# Altium PCB lab4.PcbDoc
Units mil, origin at the board's own origin, x right, y up, seen from the top; angles counter-clockwise.
Board outline 10500 x 5900 mil, 2 copper layers (Top Layer, Top, Bottom Layer, Bottom); 23 components, 17 nets, 61 pads, 0 vias.
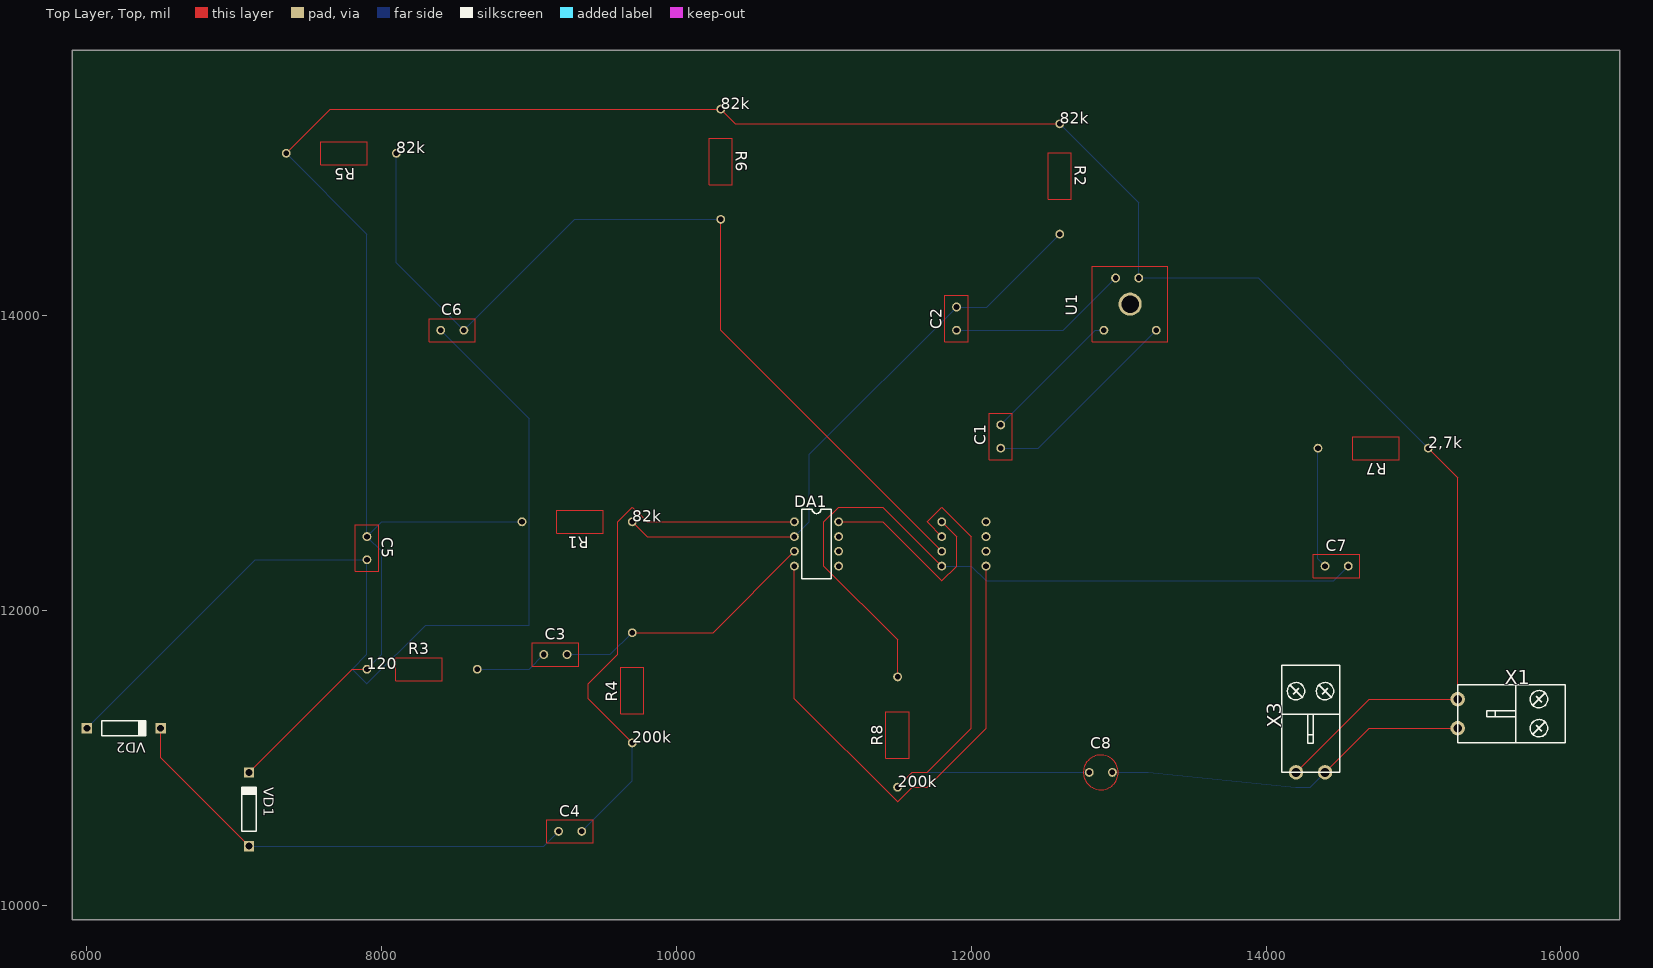
[diagram p0: Top Layer, Top view]
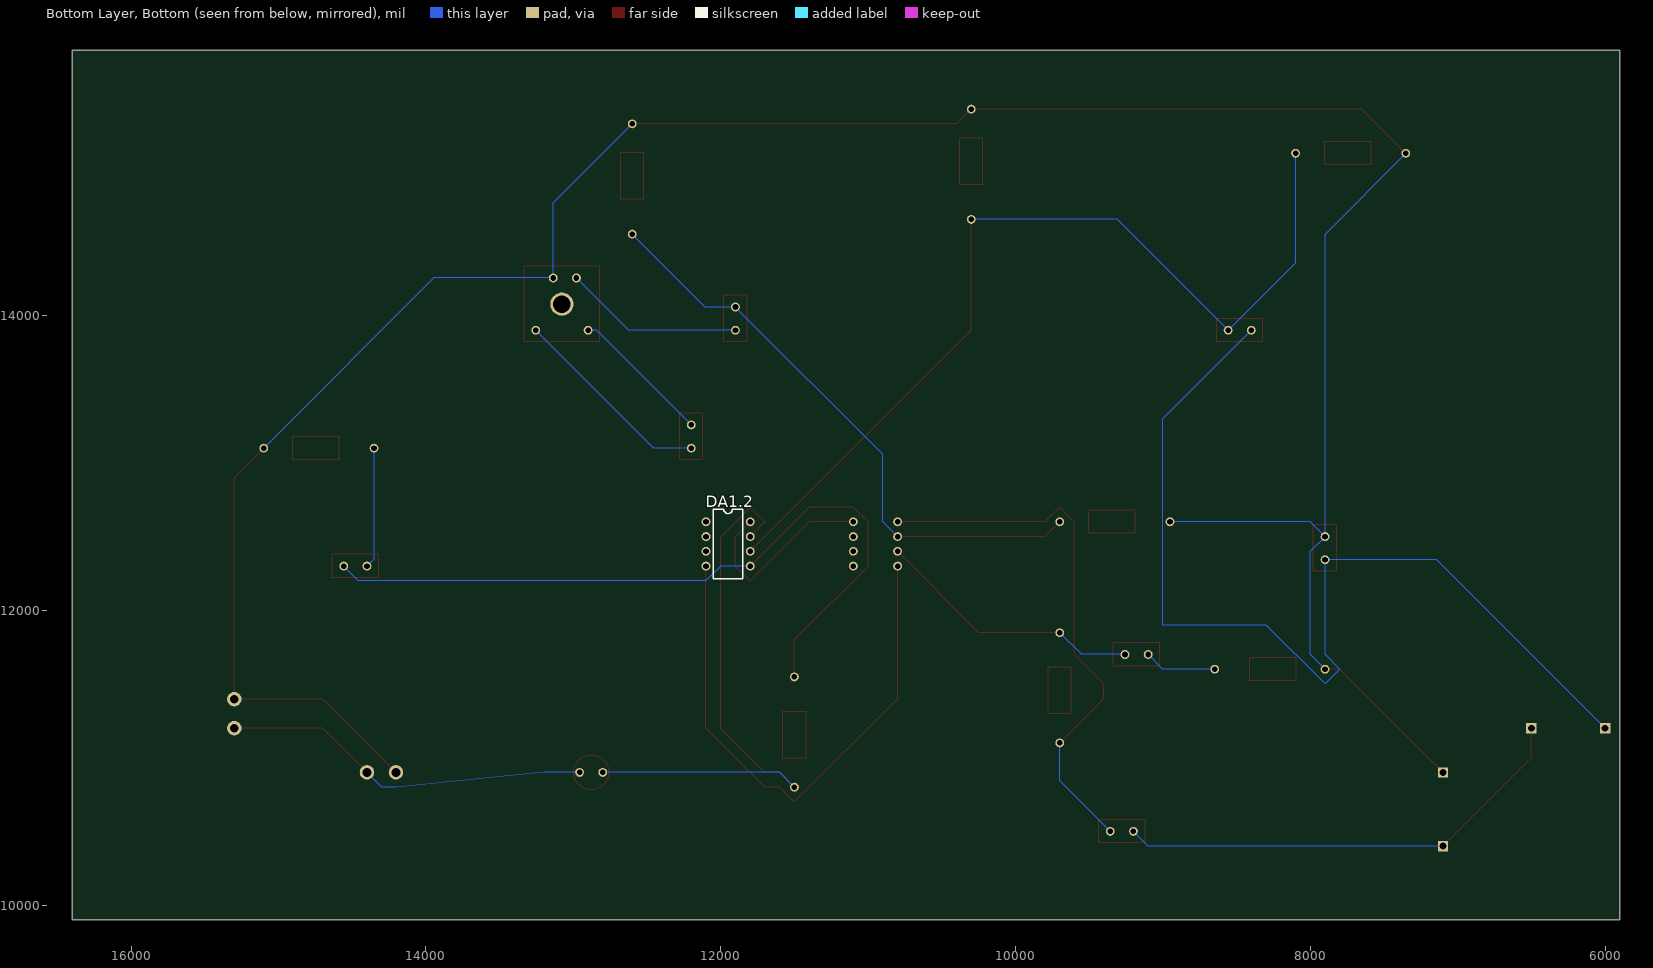
[diagram p1: Bottom Layer, Bottom view, seen from below]

## Layer stack, top to bottom
Top Solder, Top Mask: solder mask 0.4, Solder Resist, Dk 3.5
Top Layer, Top: signal copper 1.4
Dielectric 1: dielectric 12.6, FR-4, Dk 4.8
Bottom Layer, Bottom: signal copper 1.4
Bottom Solder, Bot Mask: solder mask 0.4, Solder Resist, Dk 3.5

## Board outline
5900,9900 16400,9900 16400,15800 5900,15800

## Design rules (kind name [scope] priority, off if disabled: settings)
Clearance [All] p1: gap=10 ignorepadtopadclearanceinfootprint=FALSE except(0: Arc-Hole Track-Hole SMDPad-Hole THPad-Hole Via-Hole Fill-Hole Poly-Hole Region-Hole Text-Hole; 11.81: Arc-Arc Arc-Track Arc-THPad Arc-Via Track-Track Track-THPad Track-Via THPad-THPad THPad-Via Via-Via)
PlaneClearance [All] p1: clearance=10
PolygonConnect [All] p1: connectstyle=Relief reliefconductorwidth=10 reliefentries=4 polygonreliefangle="90 Angle" airgapwidth=10
RoomDefinition "" [All] p1: confinementstyle=ConfineIn formatcopy=TRUE lockcomponents=FALSE outline 5900,9900 16400,9900 16400,15800 5900,15800
RoutingVias [All] p1: holewidth=28 width=50 viastyle="Through Hole" minholewidth=28 minwidth=50 maxholewidth=28 maxwidth=50
SolderMaskExpansion [All] p1: expansion=4
Width [All] p1: maxlimit=10 minlimit=10 preferedwidth=10
29 further rules are at their usual default settings.

## Components (designator, comment, footprint, x,y, rotation, side; value= is the part's Value field where it differs from the comment)
C1 "330" CAP1 12200,13100 r90 top
C2 "4700" CAP1 11900,13900 r90 top
C3 "0,01mk" CAP1 9100,11700 r0 top
C4 "4700" CAP1 9200,10500 r0 top
C5 "0,01mk" CAP1 7900,12500 r270 top
C6 "0,01mk" CAP1 8400,13900 r0 top
C7 "0,01mk" CAP1 14400,12300 r0 top
C8 "20mkx16B" CAP2 12800,10900 r0 top
DA1 "{Value}" DIP8 10800,12600 r0 top
DA1.2 "{Value}" DIP8 12100,12600 r180 bottom
R1 "82k" RES 9700,12600 r180 top
R2 "82k" RES 12600,15300 r270 top
R3 "120" RES 7900,11600 r0 top
R4 "200k" RES 9700,11100 r90 top
R5 "82k" RES 8100,15100 r180 top
R6 "82k" RES 10300,15400 r270 top
R7 "2,7k" RES 15100,13100 r180 top
R8 "200k" RES 11500,10800 r90 top
U1 "" TR 12900,13900 r90 top
VD1 "{Value}" DO-7 7100,10900 r270 top
VD2 "{Value}" DO-7 6500,11200 r180 top
X1 "" 2XR 15300,11200 r0 top
X3 "" 2XR 14400,10900 r90 top

## Footprints (in the part's own frame and the unit in brackets; to place one, negate y for a bottom-side part, rotate by r counter-clockwise, add the part's x,y. Pads: shape width x height; smd on the part's side, far side on the other; paste and mask are expansions set on the pad)
2XR [mm]
  round 2.5 hole 1.5: 1(0,0) 2(0,5)
  silkscreen extent 0,-2.5 18.5,7.5
CAP1 [mil]
  round 60 hole 38: 1(0,0) 2(157.48,0)
  Top Layer, Top lines w3.94: -78.74,78.74 236.22,78.74 236.22,-78.74 -78.74,-78.74 -78.74,78.74
CAP2 [mil]
  round 60 hole 38: 1(0,0) 2(157.48,0)
  Top Layer, Top circle w3.94: c78.74,0 r118.11
DIP8 [mil]
  round 60 hole 38: 1(0,0) 2(0,-100) 3(0,-200) 4(0,-300) 5(300,-300) 6(300,-200) 7(300,-100) 8(300,0)
  silkscreen extent 50,-386 250,86
DO-7 [mil]
  rect 70x70 hole 46: 1(500,0) 2(0,0)
  silkscreen extent 100,-50 400,50
RES [mil]
  round 60 hole 38: 1(0,0) 2(748.03,0)
  Top Layer, Top lines w3.94: 511.81,78.74 196.85,78.74 196.85,-78.74 511.81,-78.74 511.81,78.74
TR [mil]
  round 60 hole 38: 1(0,0) 2(0,-354.33) 3(354.33,-78.74) 4(354.33,-236.22)
  round 157.48 hole 118.11 unplated: 5(177.17,-177.17)
  Top Layer, Top lines w3.94: -78.74,78.74 433.07,78.74 433.07,-433.07 -78.74,-433.07 -78.74,78.74

## Nets (pads, with @x,y where several pads share a name; then routed paths per layer and width w, separated by ;. In a path a pad name is that pad's centre, name@x,y a point inside that pad or via, vN(x,y) a via of type N, cw(c..) or ccw(c..) an arc to the next point about the centre after c; other vN are vias at no path point)
1: C5.1 R1.2 R2.1 R3.1 R5.2 R6.1 R7.1 U1.4 VD1.2 X1.2 X3.2 | length 18205.2
  Top Layer, Top w3.94: VD1.2 7800,11600 R3.1 ; R5.2 7651.97,15400 R6.1 10400,15300 R2.1 ; X3.2 14700,11396.85 X1.2 15300,12900 R7.1
  Bottom Layer, Bottom w3.94: R5.2 7900,14551.97 C5.1 ; R3.1 8000,11700 8000,12400 C5.1 ; R1.2 8000,12600 C5.1 ; R2.1 13136.22,14763.78 U1.4 13945.67,14254.33 R7.1
GND: DA1.2.4 DA1.4 | length 3797.1
  Top Layer, Top w3.94: DA1.4 10800,11400 11500,10700 11600,10800 11700,10800 12100,11200 DA1.2.4
NET00000: C2.2 DA1.2 R1.1 R2.2 | length 4059.4
  Top Layer, Top w3.94: R1.1 9800,12500 DA1.2
  Bottom Layer, Bottom w3.94: DA1.2 10900,12600 10900,13057.48 C2.2 12105.51,14057.48 R2.2
NET00001: C3.2 DA1.3 R4.2 | length 1832.5
  Top Layer, Top w3.94: R4.2 10248.03,11848.03 DA1.3
  Bottom Layer, Bottom w3.94: C3.2 9551.97,11700 R4.2
NET00002: C3.1 R3.2 | length 493.4
  Bottom Layer, Bottom w3.94: R3.2 9000,11600 C3.1
NET00003: C4.2 DA1.1 R4.1 | length 3731.8
  Top Layer, Top w3.94: R4.1 9400,11400 9400,11500 9600,11700 9600,12600 9700,12700 9800,12600 DA1.1
  Bottom Layer, Bottom w3.94: C4.2 9700,10842.52 R4.1
NET00004: C4.1 VD1.1 VD2.2 | length 3189.9
  Top Layer, Top w3.94: VD2.2 6500,11000 VD1.1
  Bottom Layer, Bottom w3.94: VD1.1 9100,10400 C4.1
NET00005: C5.2 C6.1 VD2.1 | length 6812.8
  Bottom Layer, Bottom w3.94: VD2.1 7142.52,12342.52 C5.2 7900,11700 7800,11600 7900,11500 8300,11900 9000,11900 9000,13300 C6.1
NET00006: C6.2 DA1.2.6 R5.1 R6.2 | length 6316.8
  Top Layer, Top w3.94: R6.2 10300,13900 DA1.2.6
  Bottom Layer, Bottom w3.94: R5.1 8100,14357.48 C6.2 9309.45,14651.97 R6.2
NET00008: C7.1 R7.2 | length 819.9
  Bottom Layer, Bottom w3.94: R7.2 14351.97,12348.03 C7.1
NET00009: C7.2 DA1.2.5 R8.2 | length 5106.5
  Top Layer, Top w3.94: R8.2 11500,11800 11000,12300 11000,12600 11100,12700 11400,12700 DA1.2.5
  Bottom Layer, Bottom w3.94: DA1.2.5 12000,12300 12100,12200 14457.48,12200 C7.2
NET00010: C8.1 DA1.2.7 R8.1 | length 3872.8
  Top Layer, Top w3.94: R8.1 11600,10900 11700,10900 12000,11200 12000,12500 11800,12700 11700,12600 DA1.2.7
  Bottom Layer, Bottom w3.94: R8.1 11600,10900 C8.1
NET00011: C8.2 X1.1 X3.1 | length 2513.2
  Top Layer, Top w3.94: X3.1 14700,11200 X1.1
  Bottom Layer, Bottom w3.94: C8.2 13200,10900 14200,10800 14300,10800 X3.1
NET00013: C1.1 U1.2 | length 1385.7
  Bottom Layer, Bottom w3.94: C1.1 12454.33,13100 U1.2
NET00014: C1.2 U1.1 | length 966.1
  Bottom Layer, Bottom w3.94: C1.2 12842.52,13900 U1.1
NET00015: C2.1 U1.3 | length 1225.5
  Bottom Layer, Bottom w3.94: C2.1 12624.41,13900 U1.3
VCC: DA1.2.8 DA1.8 | length 1348.5
  Top Layer, Top w3.94: DA1.8 11400,12600 11800,12200 11900,12300 11900,12500 DA1.2.8
pads on no net: DA1.2.1 DA1.2.2 DA1.2.3 DA1.5 DA1.6 DA1.7 U1.5